# EAGLE board SHIELD (EAGLE 7.7.0)
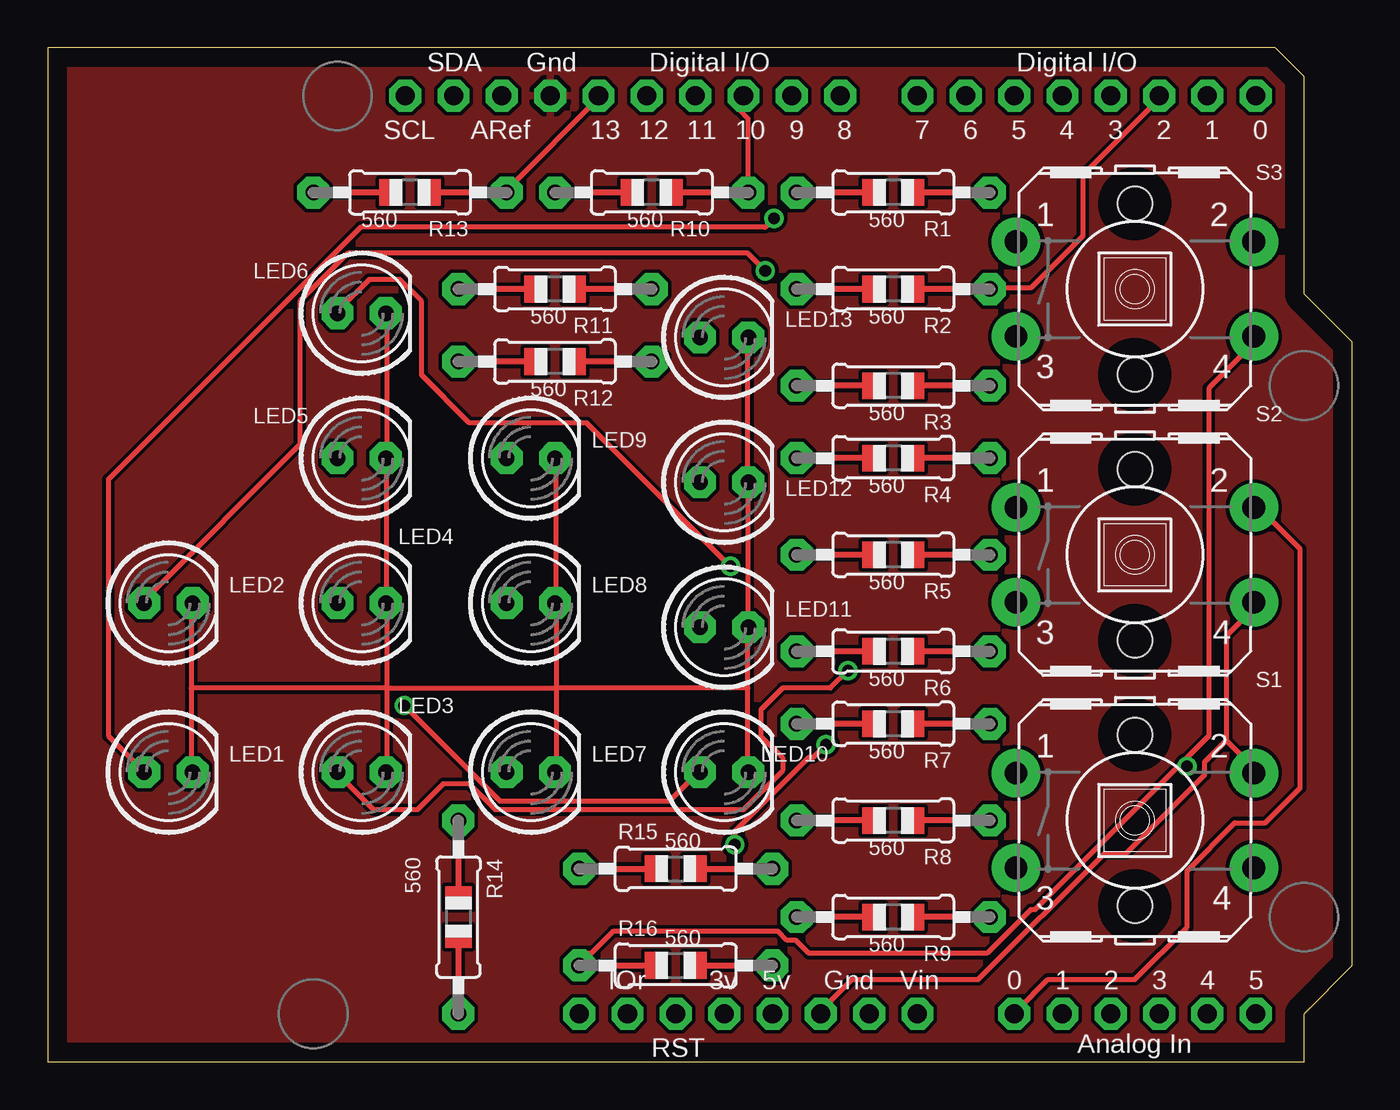
[diagram p0: board, top side]
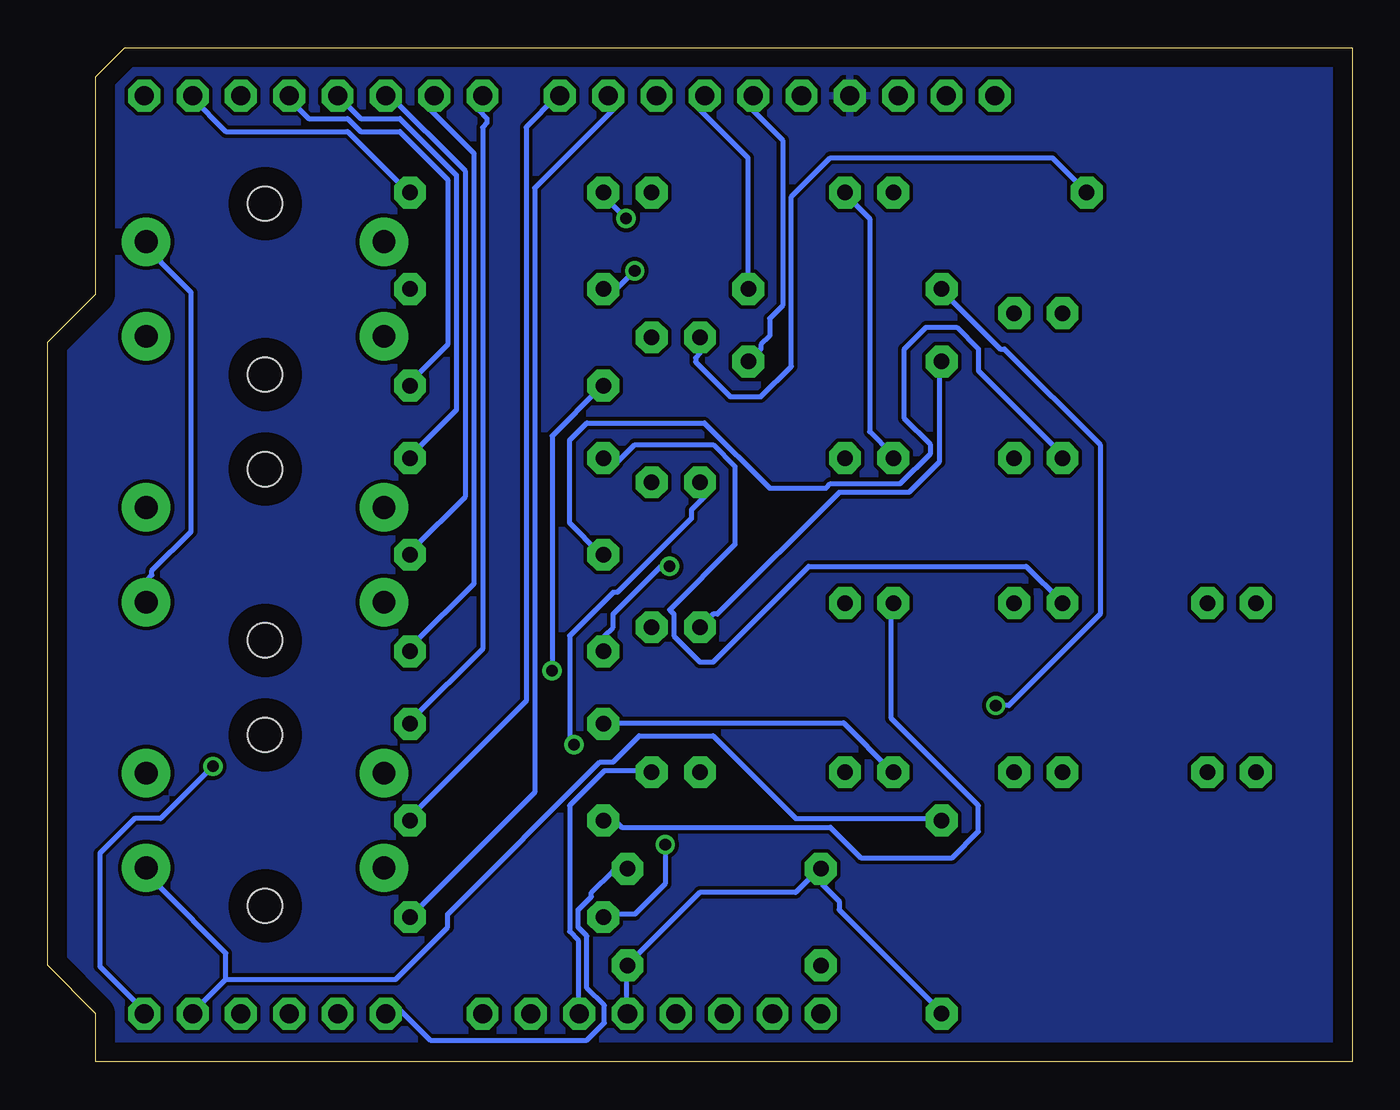
[diagram p1: board, bottom side, seen from below]

Size 68.58 x 53.34 mm. Coordinates in mm from the lower left corner, seen from the top.
Copper layers (1*16): Top 0.035mm / dielectric 1.5mm / Bottom 0.035mm
Design rules "default": minimum track width 10mil, minimum drill 24mil, track to track 8mil, track to pad 8mil, pad to pad 8mil, via to via 8mil, smd to smd 8mil, copper to edge 40mil, drill to drill 8mil, minimum pad ring 10mil, minimum via ring 8mil, stop-mask expansion 4mil, vias tented up to drill 0mil, thermal gap 10mil

## Footprints (pad centres in the part's own frame; a part is rotated, then mirrored left to right if it is on the bottom)
LED5MM = drill 0.813 pad 1.676 octagon: A -1.27,0; K 1.27,0
0805-THM = drill 0.813 pad 1.676 octagon: 1 -5.08,0; 2 5.08,0
B3F-40XX-ROUND = drill 1.194 pad 2.54: 1 -6.248,2.489; 2 6.248,2.489; 3 -6.248,-2.489; 4 6.248,-2.489 | hole 1.803: 0,-4.496; 0,4.496
ARDUINOR3 = drill 1 pad 1.676 octagon: 3V 35.56,2.54; 5V 38.1,2.54; A0 50.8,2.54; A1 53.34,2.54; A2 55.88,2.54; A3 58.42,2.54; A4 60.96,2.54; A5 63.5,2.54; AREF 23.876,50.8; D0 63.5,50.8; D1 60.96,50.8; D2 58.42,50.8; D3 55.88,50.8; D4 53.34,50.8; D5 50.8,50.8; D6 48.26,50.8; D7 45.72,50.8; D8 41.656,50.8; D9 39.116,50.8; D10 36.576,50.8; D11 34.036,50.8; D12 31.496,50.8; D13 28.956,50.8; GND 26.416,50.8; GND1 43.18,2.54; GND2 40.64,2.54; IOREF 30.48,2.54; RESERVED 27.94,2.54; RESET 33.02,2.54; SCL 18.796,50.8; SDA 21.336,50.8; VIN 45.72,2.54

## Placement (x,y rotation side)
LED1  [LED5MM]  6.35,15.24 0 top
LED2  [LED5MM]  6.35,24.13 0 top
LED3  [LED5MM]  16.51,15.24 0 top
LED4  [LED5MM]  16.51,24.13 0 top
LED5  [LED5MM]  16.51,31.75 0 top
LED6  [LED5MM]  16.51,39.37 0 top
LED7  [LED5MM]  25.4,15.24 0 top
LED8  [LED5MM]  25.4,24.13 0 top
LED9  [LED5MM]  25.4,31.75 0 top
LED10  [LED5MM]  35.56,15.24 0 top
LED11  [LED5MM]  35.56,22.86 0 top
LED12  [LED5MM]  35.56,30.48 0 top
LED13  [LED5MM]  35.56,38.1 0 top
R1  560  [0805-THM]  44.45,45.72 180 top
R2  560  [0805-THM]  44.45,40.64 180 top
R3  560  [0805-THM]  44.45,35.56 180 top
R4  560  [0805-THM]  44.45,31.75 180 top
R5  560  [0805-THM]  44.45,26.67 180 top
R6  560  [0805-THM]  44.45,21.59 180 top
R7  560  [0805-THM]  44.45,17.78 180 top
R8  560  [0805-THM]  44.45,12.7 180 top
R9  560  [0805-THM]  44.45,7.62 180 top
R10  560  [0805-THM]  31.75,45.72 180 top
R11  560  [0805-THM]  26.67,40.64 180 top
R12  560  [0805-THM]  26.67,36.83 180 top
R13  560  [0805-THM]  19.05,45.72 180 top
R14  560  [0805-THM]  21.59,7.62 270 top
R15  560  [0805-THM]  33.02,10.16 0 top
R16  560  [0805-THM]  33.02,5.08 0 top
S1  [B3F-40XX-ROUND]  57.15,12.7 0 top
S2  [B3F-40XX-ROUND]  57.15,26.67 0 top
S3  [B3F-40XX-ROUND]  57.15,40.64 0 top
U1  ARDUINOR3-DIMENSION  [ARDUINOR3]  0,0 0 top

## Library data of the parts
LED1-LED13 R1-R16 S1-S3 U1 = adafruit

## Nets
3V: U1.3V
GND: U1.GND
GND1: U1.GND1
N$1: LED1.A R1.2
N$2: LED2.A R2.2
N$3: LED3.A R3.2
N$4: R14.2 R15.1 R16.2 U1.5V
N$5: LED4.A R4.2
N$6: LED5.A R5.2
N$7: LED6.A R6.2
N$8: R14.1 S1.4 U1.A4
N$9: LED8.A R8.2
N$10: LED7.A R7.2
N$11: R16.1 S3.4 U1.A5
N$12: LED9.A R10.2
N$13: LED10.A R11.2
N$14: LED11.A R12.2
N$15: R15.2 S2.2 U1.A0
N$16: R1.1 U1.D1
N$17: R2.1 U1.D2
N$18: R3.1 U1.D3
N$19: R4.1 U1.D4
N$20: R5.1 U1.D5
N$21: R6.1 U1.D6
N$22: R7.1 U1.D7
N$23: R8.1 U1.D8
N$24: R9.1 U1.D9
N$25: R10.1 U1.D10
N$26: R11.1 U1.D11
N$27: LED12.A R9.2
N$28: LED13.A R13.2
N$29: R12.1 U1.D12
N$30: R13.1 U1.D13
N$31: LED1.K LED2.K LED3.K LED4.K LED5.K LED6.K LED7.K LED8.K LED9.K LED10.K LED11.K LED12.K LED13.K S1.2 S2.4 S3.2 U1.GND2
VIN: U1.VIN

## Tracks (layer width: path | path; a pad name or v marks a point on that pad's centre or on a via)
GND
  pour Bottom: 0,0 66.04,0 66.04,2.54 68.58,5.08 68.58,38.1 66.04,40.64 66.04,52.07 64.77,53.34 0,53.34
  pour Top: 0,0 66.04,0 66.04,2.54 68.58,5.08 68.58,38.1 66.04,40.64 66.04,52.07 64.77,53.34 0,53.34
N$1  (via drill 0.61)
  Top 0.254: v38.18,44.35 37.72,43.89 16.46,43.89 3.2,30.63 3.2,17.14 5.03,15.32 LED1.A
  Bottom 0.254: v38.18,44.35 39.55,45.72 R1.2
N$2  (via drill 0.61)
  Top 0.254: v37.72,41.6 36.8,42.52 15.77,42.52 13.26,40.01 13.26,32.46 5.26,24.46 5.26,24.23 LED2.A
  Bottom 0.254: v37.72,41.6 38.63,40.69 39.32,40.69 R2.2
N$3  (via drill 0.61)
  Top 0.254: v42.06,20.57 41.15,19.66 38.63,19.66 37.49,18.52 37.49,17.14 38.63,16 38.63,15.32 36.58,13.26 23.55,13.26 22.17,14.63 20.8,14.63 19.43,13.26 17.14,13.26 15.32,15.09 LED3.A
  Bottom 0.254: v42.06,20.57 42.06,32.92 39.55,35.43 R3.2
N$4
  Bottom 0.254: U1.5V 38.18,2.74 38.18,5.03 R16.2 37.95,5.26 34.29,8.91 29.26,8.91 28.12,10.06 R15.1 27.89,10.06 27.89,9.37 26.98,8.46 26.98,8 21.72,2.74 R14.2
N$5
  Bottom 0.254: LED4.A 15.32,24.23 17.14,26.06 28.57,26.06 33.6,21.03 34.29,21.03 35.66,22.4 35.66,23.55 35.89,23.77 32.46,27.2 32.46,31.32 33.6,32.46 37.72,32.46 38.63,31.55 39.32,31.55 R4.2
N$6
  Bottom 0.254: LED5.A 15.32,31.77 15.32,32 19.66,36.35 19.66,37.49 20.8,38.63 22.4,38.63 23.55,37.49 23.55,33.83 22.17,32.46 22.17,32 23.77,30.4 27.43,30.4 27.66,30.18 30.63,30.18 34.06,33.6 40.23,33.6 41.15,32.69 41.15,28.35 39.55,26.75 R5.2
N$7  (via drill 0.61)
  Top 0.254: v35.89,26.06 28.35,33.6 22.17,33.6 19.66,36.12 19.66,40.01 18.52,41.15 16.92,41.15 15.32,39.55 LED6.A
  Bottom 0.254: v35.89,26.06 36.35,26.06 38.86,23.55 38.86,22.86 39.32,22.4 39.32,21.72 R6.2
N$8
  Bottom 0.254: 59.21,4.34 50.29,4.34 47.55,7.09 47.55,7.77 39.55,15.77 38.86,15.77 37.49,17.14 33.6,17.14 29.26,12.8 21.72,12.8 R14.1 | 59.21,4.34 60.81,2.74 U1.A4 | 59.21,4.34 59.21,5.71 62.64,9.14 62.64,9.37 63.32,10.06 S1.4
N$9
  Bottom 0.254: LED8.A 24.23,24 24.23,18.06 19.66,13.49 19.66,12.12 21.03,10.74 25.83,10.74 27.43,12.34 38.41,12.34 38.63,12.57 39.32,12.57 R8.2
N$10
  Bottom 0.254: LED7.A 24.23,15.32 26.75,17.83 39.32,17.83 R7.2
N$11  (via drill 0.61)
  Top 0.254: 59.66,15.77 61.04,17.14 61.04,35.43 63.55,37.95 S3.4 | 59.66,15.77 51.89,8 51.66,8 49.38,5.71 40.01,5.71 39.32,6.4 38.86,6.4 38.41,6.86 29.72,6.86 28.57,5.71 28.35,5.71 27.89,5.26 R16.1 | 59.66,15.77 v59.89,15.54
  Bottom 0.254: v59.89,15.54 62.64,12.8 64.01,12.8 65.84,10.97 65.84,5.03 63.55,2.74 U1.A5
N$12
  Bottom 0.254: LED9.A 24.23,31.77 24.23,32 25.38,33.15 25.38,44.35 26.75,45.72 R10.2
N$13  (via drill 0.61)
  Top 0.254: v18.75,18.75 23.77,13.72 32.69,13.72 34.06,15.09 34.29,15.09 LED10.A
  Bottom 0.254: v18.75,18.75 18.06,18.75 13.26,23.55 13.26,32.46 18.29,37.49 18.52,37.49 21.49,40.46 R11.2
N$14
  Bottom 0.254: LED11.A 33.6,23.55 33.38,23.55 26.98,29.95 23.32,29.95 21.72,31.55 21.72,36.8 R12.2
N$15
  Top 0.254: S2.2 63.55,29.03 64.01,28.57 64.24,28.57 65.84,26.98 65.84,14.4 64.01,12.57 62.41,12.57 59.89,10.06 59.89,7.09 57.15,4.34 52.58,4.34 50.98,2.74 U1.A0
  Bottom 0.254: R15.2 38.18,10.06 38.86,10.06 40.01,8.91 40.01,8.69 40.69,8 40.69,7.09 40.23,6.63 40.23,3.89 39.32,2.97 39.32,2.06 40.23,1.14 48.46,1.14 50.06,2.74 50.75,2.74 U1.A0
N$16
  Bottom 0.254: R1.1 49.61,45.72 52.81,48.92 59.21,48.92 61.04,50.75 U1.D1
N$17
  Top 0.254: R2.1 49.61,40.69 51.66,40.69 54.41,43.43 54.41,46.63 58.52,50.75 U1.D2
N$18
  Bottom 0.254: R3.1 49.38,35.66 49.38,35.89 47.55,37.72 47.55,46.41 50.06,48.92 52.12,48.92 52.81,49.61 54.86,49.61 56.01,50.75 U1.D3
N$19
  Bottom 0.254: R4.1 49.38,31.77 49.38,32 47.09,34.29 47.09,46.63 50.06,49.61 52.12,49.61 53.26,50.75 U1.D4
N$20
  Bottom 0.254: R5.1 49.38,26.75 49.38,26.98 46.63,29.72 46.63,46.86 50.75,50.98 U1.D5
N$21
  Bottom 0.254: R6.1 49.38,21.72 49.38,21.95 46.18,25.15 46.18,47.78 48.46,50.06 48.46,50.75 U1.D6
N$22
  Bottom 0.254: R7.1 49.38,17.83 49.38,18.06 45.72,21.72 45.72,49.15 45.49,49.38 45.49,49.61 45.95,50.06 45.95,50.52 45.72,50.75 U1.D7
N$23
  Bottom 0.254: R8.1 49.38,12.8 49.38,13.03 43.43,18.97 43.43,49.15 41.83,50.75 U1.D8
N$24
  Bottom 0.254: R9.1 42.98,14.17 42.98,45.95 38.86,50.06 38.86,50.52 39.09,50.75 U1.D9
N$25
  Top 0.254: R10.1 36.8,45.72 36.8,49.61 36.35,50.06 36.35,50.52 36.58,50.75 U1.D10
N$26
  Bottom 0.254: R11.1 31.77,40.69 31.77,47.55 34.29,50.06 34.29,50.52 34.06,50.75 U1.D11
N$27  (via drill 0.61)
  Top 0.254: v36.12,11.43 36.12,12.12 40.01,16 40.23,16 v40.92,16.69
  Bottom 0.254: v36.12,11.43 36.12,9.37 37.72,7.77 39.32,7.77 R9.2 | v40.92,16.69 41.15,16.92 41.15,22.4 38.86,24.69 38.63,24.69 34.75,28.57 34.75,29.03 34.06,29.72 34.06,30.18 34.29,30.4 LED12.A
N$28
  Bottom 0.254: LED13.A 34.29,37.26 34.52,37.03 34.52,36.8 32.69,34.98 31.09,34.98 29.49,36.58 29.49,45.49 27.43,47.55 15.77,47.55 14.17,45.95 14.17,45.72 R13.2
N$29
  Bottom 0.254: R12.1 31.09,37.49 31.09,37.72 30.63,38.18 30.63,39.09 29.95,39.78 29.95,48.46 31.55,50.06 31.55,50.75 U1.D12
N$30
  Top 0.254: R13.1 24.23,45.72 24.23,45.95 29.03,50.75 U1.D13
N$31
  Top 0.254: 26.75,19.66 26.75,24 LED8.K 26.75,24.23 26.75,31.55 LED9.K | 26.75,19.66 26.75,15.32 LED7.K | 7.54,19.66 7.54,24 LED2.K | 7.54,19.66 7.54,15.32 LED1.K | LED6.K 17.83,39.32 17.83,31.77 LED5.K 17.83,31.55 17.83,24.23 LED4.K 17.83,24 17.83,19.66 | 17.83,19.66 17.83,15.32 LED3.K | 17.83,19.66 7.54,19.66 | 17.83,19.66 26.75,19.66 | 61.95,16.92 62.64,16.23 62.64,16 63.32,15.32 S1.2 | 61.95,16.92 61.95,22.4 63.55,24 S2.4 | 36.8,22.86 36.8,30.4 LED12.K 36.8,30.63 36.8,37.95 LED13.K | 36.8,19.66 36.8,15.32 LED10.K | 36.8,19.66 36.8,22.86 | 36.8,22.86 LED11.K | 61.95,16.92 60.81,15.77 60.81,15.09 56.69,10.97 55.55,10.97 48.92,4.34 42.29,4.34 40.69,2.74 U1.GND2 | 36.8,19.66 26.75,19.66
  Bottom 0.254: S3.2 63.32,42.98 62.64,42.29 62.64,42.06 61.04,40.46 61.04,27.89 63.09,25.83 63.09,25.6 63.32,25.38 63.32,24.23 S2.4 | U1.GND2 40.69,2.74 40.69,6.4 41.15,6.86 41.15,13.49 39.32,15.32 37.03,15.32 LED10.K